# Altium PCB iso1212.pcbdoc
Units mil, origin at the board's own origin, x right, y up, seen from the top; angles counter-clockwise.
Board outline not stored, 2 copper layers (Top Layer, Bottom Layer); 11 components, 0 nets, 36 pads, 7 vias.
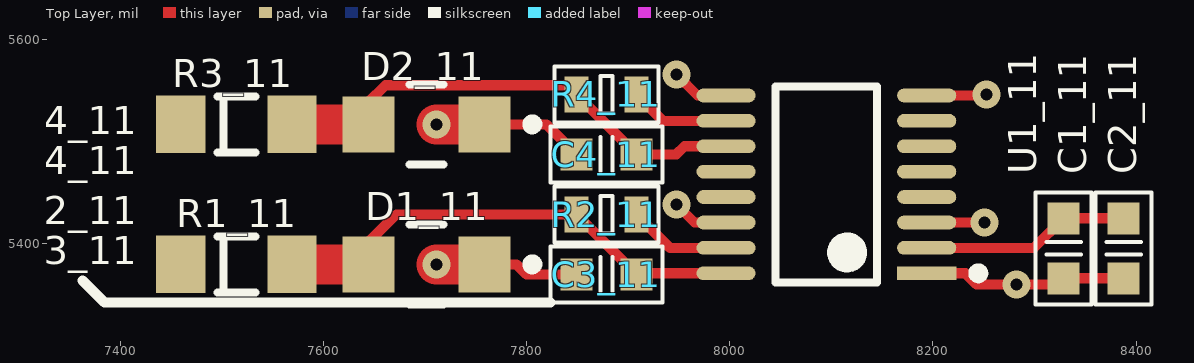
[diagram p0: Top Layer view]
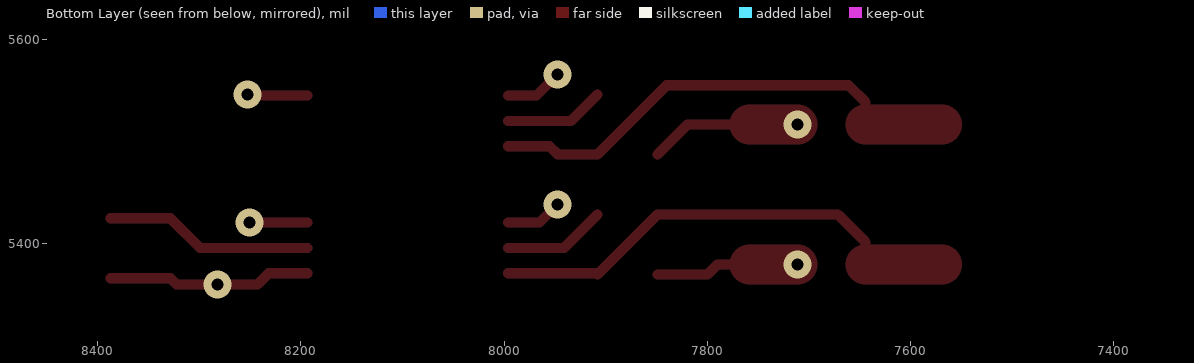
[diagram p1: Bottom Layer view, seen from below]

## Layer stack, top to bottom
Top Solder: solder mask 0.4, Solder Resist, Dk 3.5
Top Layer: signal copper 1.4
Dielectric 1: dielectric 12.6, FR-4, Dk 4.8
Bottom Layer: signal copper 1.4
Bottom Solder: solder mask 0.4, Solder Resist, Dk 3.5

## Components (designator, comment, footprint, x,y, rotation, side; value= is the part's Value field where it differs from the comment)
C1_11 "1uF 25V" C_0603 8328.57,5394.86 r90 top (schematic designator C1)
C2_11 "100nF 25V" C_0603 8387.63,5394.86 r90 top (schematic designator C2)
C3_11 "10nF 50V" C_0603 7878.5,5369.17 r180 top (schematic designator C3)
C4_11 "10nF 50V" C_0603 7878.5,5487.28 r180 top (schematic designator C4)
D1_11 "SMF36A" SOD123FL 7701.34,5379.02 r180 top (schematic designator D1)
D2_11 "SMF36A" SOD123FL 7701.34,5516.81 r180 top (schematic designator D2)
R1_11 "SMM02040C2491FB000" FP-SMM0204-IPC_C 7514.33,5379.02 r0 top value="2.49K 1%" (schematic designator R1)
R2_11 "562 Ohm 1%" R_0603 7878.5,5428.23 r0 top (schematic designator R2)
R3_11 "SMM02040C2491FB000" FP-SMM0204-IPC_C 7514.33,5516.81 r0 top value="2.49K 1%" (schematic designator R3)
R4_11 "562 Ohm 1%" R_0603 7878.5,5546.34 r0 top (schematic designator R4)
U1_11 "ISO1212" FP-DBQ0016A-IPC_C 8095.04,5457.76 r180 top (schematic designator U1)

## Footprints (in the part's own frame and the unit in brackets; to place one, negate y for a bottom-side part, rotate by r counter-clockwise, add the part's x,y. Pads: shape width x height; smd on the part's side, far side on the other; paste and mask are expansions set on the pad)
C_0603 [mm] "Chip Capacitor; Body 1.6 x 0.8 mm (LxW typ)"
  rect 0.8x0.8 smd: 1(-0.75,0) 2(0.75,0)
  silkscreen extent -1.4,-0.7 1.4,0.7, body extent -0.8,-0.4 0.8,0.4, height 0.3
FP-DBQ0016A-IPC_C [mil]
  rect 58.26x13.56 smd paste+0 mask+0: 1(-98.75,87.5)
  rrect100% 58.26x13.56 smd paste+0 mask+0: 2(-98.75,62.5) 3(-98.75,37.5) 4(-98.75,12.5) 5(-98.75,-12.5) 6(-98.75,-37.5) 7(-98.75,-62.5) 8(-98.75,-87.5) 9(98.75,-87.5) 10(98.75,-62.5) 11(98.75,-37.5) 12(98.75,-12.5) 13(98.75,12.5) 14(98.75,37.5) 15(98.75,62.5) 16(98.75,87.5)
  silkscreen extent -154,-97 50,97, body extent -132,-100 132,100, height 10
FP-SMM0204-IPC_C [mil]
  rect 48.41x56.79 smd paste+0 mask+0: 1(-54.77,0) 2(54.77,0)
  silkscreen extent -19,-28 19,28, body extent -83,-31 83,31, height 10
R_0603 [mm]
  rect 0.6x0.9 smd: 1(-0.75,0) 2(0.75,0)
  silkscreen extent -1.3,-0.7 1.3,0.7, body extent -0.8,-0.41 0.8,0.41, height 0.45
SOD123FL [mm]
  rect 1.3x1.4 smd paste+0 mask+0: 1(-1.45,0) 2(1.45,0)
  silkscreen extent -2.78,-1 0.43,1, body extent -1.8,-0.87 1.85,0.88, height 1.1

## Part data
C1_11 C2_11 C3_11 C4_11: library part C0603, "Capacitor"
D1_11 D2_11: library part D_SOD123FL
R1_11 R3_11: library part SMM0204, "Resistor"
R2_11 R4_11: library part R0603, "Resistor"

## Via types
v1: diameter 27.56, hole 11.81, Top Layer to Bottom Layer, tented both sides, 7 vias

## Nets (pads, with @x,y where several pads share a name; then routed paths per layer and width w, separated by ;. In a path a pad name is that pad's centre, name@x,y a point inside that pad or via, vN(x,y) a via of type N, cw(c..) or ccw(c..) an arc to the next point about the centre after c; other vN are vias at no path point)
pads on no net: C1_11.1 C1_11.2 C2_11.1 C2_11.2 C3_11.1 C3_11.2 C4_11.1 C4_11.2 D1_11.1 D1_11.2 D2_11.1 D2_11.2 R1_11.1 R1_11.2 R2_11.1 R2_11.2 R3_11.1 R3_11.2 R4_11.1 R4_11.2 U1_11.1 U1_11.2 U1_11.3 U1_11.4 U1_11.5 U1_11.6 U1_11.7 U1_11.8 U1_11.9 U1_11.10 U1_11.11 U1_11.12 U1_11.13 U1_11.14 U1_11.15 U1_11.16
copper on no net: | length 2101.8
  Top Layer w10: 7644.25,5379.02 7644.25,5400.67 7671.81,5428.23 7848.98,5428.23 7908.03,5369.17 7909.11,5370.26 7996.29,5370.26 ; 7644.25,5516.81 7644.25,5538.46 7661.06,5555.28 7840.04,5555.28 7848.98,5546.34 7908.03,5487.28 7947.4,5487.28 7955.37,5495.26 7996.29,5495.26 ; 7758.42,5379.02 7789.92,5379.02 7799.76,5369.17 7848.98,5369.17 ; 7758.42,5516.81 7819.45,5516.81 7848.98,5487.28 ; 7908.03,5428.23 7941,5395.26 7996.29,5395.26 ; 7908.03,5546.34 7934.11,5520.26 7996.29,5520.26 ; v1(7947.4,5438.07) 7965.22,5420.26 7996.29,5420.26 ; v1(7947.4,5566.02) 7968.17,5545.26 7996.29,5545.26 ; 8193.79,5370.26 8231.75,5370.26 8242.68,5359.33 v1(8282.05,5359.33) 8322.57,5359.33 8328.57,5365.33 8387.63,5365.33 ; 8193.79,5395.26 8299.44,5395.26 8328.57,5424.39 8387.63,5424.39 ; 8193.79,5420.26 v1(8250.65,5420.26) ; 8193.79,5545.26 8251.44,5545.26 v1(8252.52,5546.34)
  Top Layer w39.37: 7569.1,5379.02 7644.25,5379.02 ; 7569.1,5516.81 7644.25,5516.81 ; v1(7711.18,5379.02) 7758.42,5379.02 ; v1(7711.18,5516.81) 7758.42,5516.81

## Silkscreen, mask and mechanical layers (free items; w line width, h text height)
Top Overlay:
  lines w10: 7362.76,5363.27 7384.41,5341.61 7823.39,5341.61